# EAGLE board lb_rb (EAGLE 6.5.0)
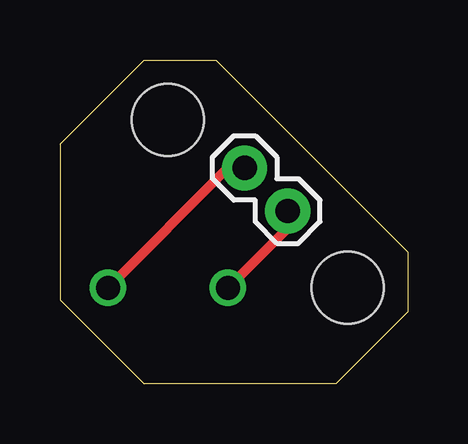
[diagram p0: board, top side]
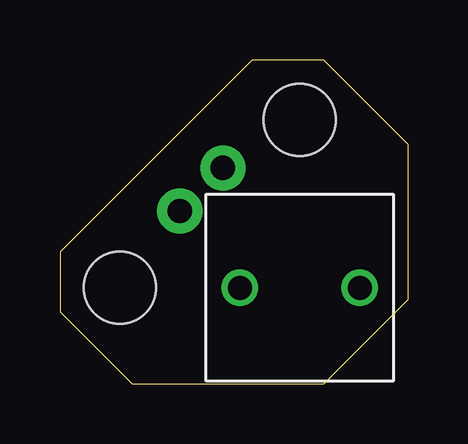
[diagram p1: board, bottom side, seen from below]

Size 14.5 x 13.5 mm. Coordinates in mm from the lower left corner, seen from the top.
Outline: 6.5,13.5 14.5,5.5 14.5,3 11.5,0 3.5,0 0,3.5 0,10 3.5,13.5 6.5,13.5
Copper layers (1*16): Top 0.035mm / dielectric 1.5mm / Bottom 0.035mm
Design rules "default": minimum track width 10mil, minimum drill 24mil, track to track 8mil, track to pad 8mil, pad to pad 8mil, via to via 8mil, smd to smd 8mil, copper to edge 40mil, drill to drill 8mil, minimum pad ring 10mil, minimum via ring 8mil, stop-mask expansion 4mil, vias tented up to drill 0mil, thermal gap 10mil
Holes 3 mm at 4.5,11 12,4

## Footprints (pad centres in the part's own frame; a part is rotated, then mirrored left to right if it is on the bottom)
1X02 = drill 1.016 pad 1.88: 1 0,0; 2 2.54,0
SKPDAMD010 = drill 1: P$1 -2.5,0; P$2 2.5,0

## Placement (x,y rotation side)
JP1  [1X02]  9.5,7.2 135 top
U$1  SKPDAMD010  [SKPDAMD010]  4.5,4 180 bottom

## Library data of the parts
JP1 = SparkFun-Connectors
U$1 = BMO; MOUSER: 688-SKPDAM

## Nets
1: JP1.1 U$1.P$2
2: JP1.2 U$1.P$1

## Tracks (layer width: path | path; a pad name or v marks a point on that pad's centre or on a via)
1
  Top 0.406: JP1.1 9.5,6.5 U$1.P$2
2
  Top 0.406: JP1.2 7,9 U$1.P$1

## Text on the board
tDocu: BMO LB / REV A | N. Jackson / 7/16
bDocu: BMO RB / REV A | N. Jackson / 7/16